# Altium PCB 总板.PcbDoc
Units mil, origin at the board's own origin, x right, y up, seen from the top; angles counter-clockwise.
Board outline 4330.71 x 3149.61 mil, 2 copper layers (Top Layer, Bottom Layer); 14 components, 43 nets, 169 pads, 21 vias.
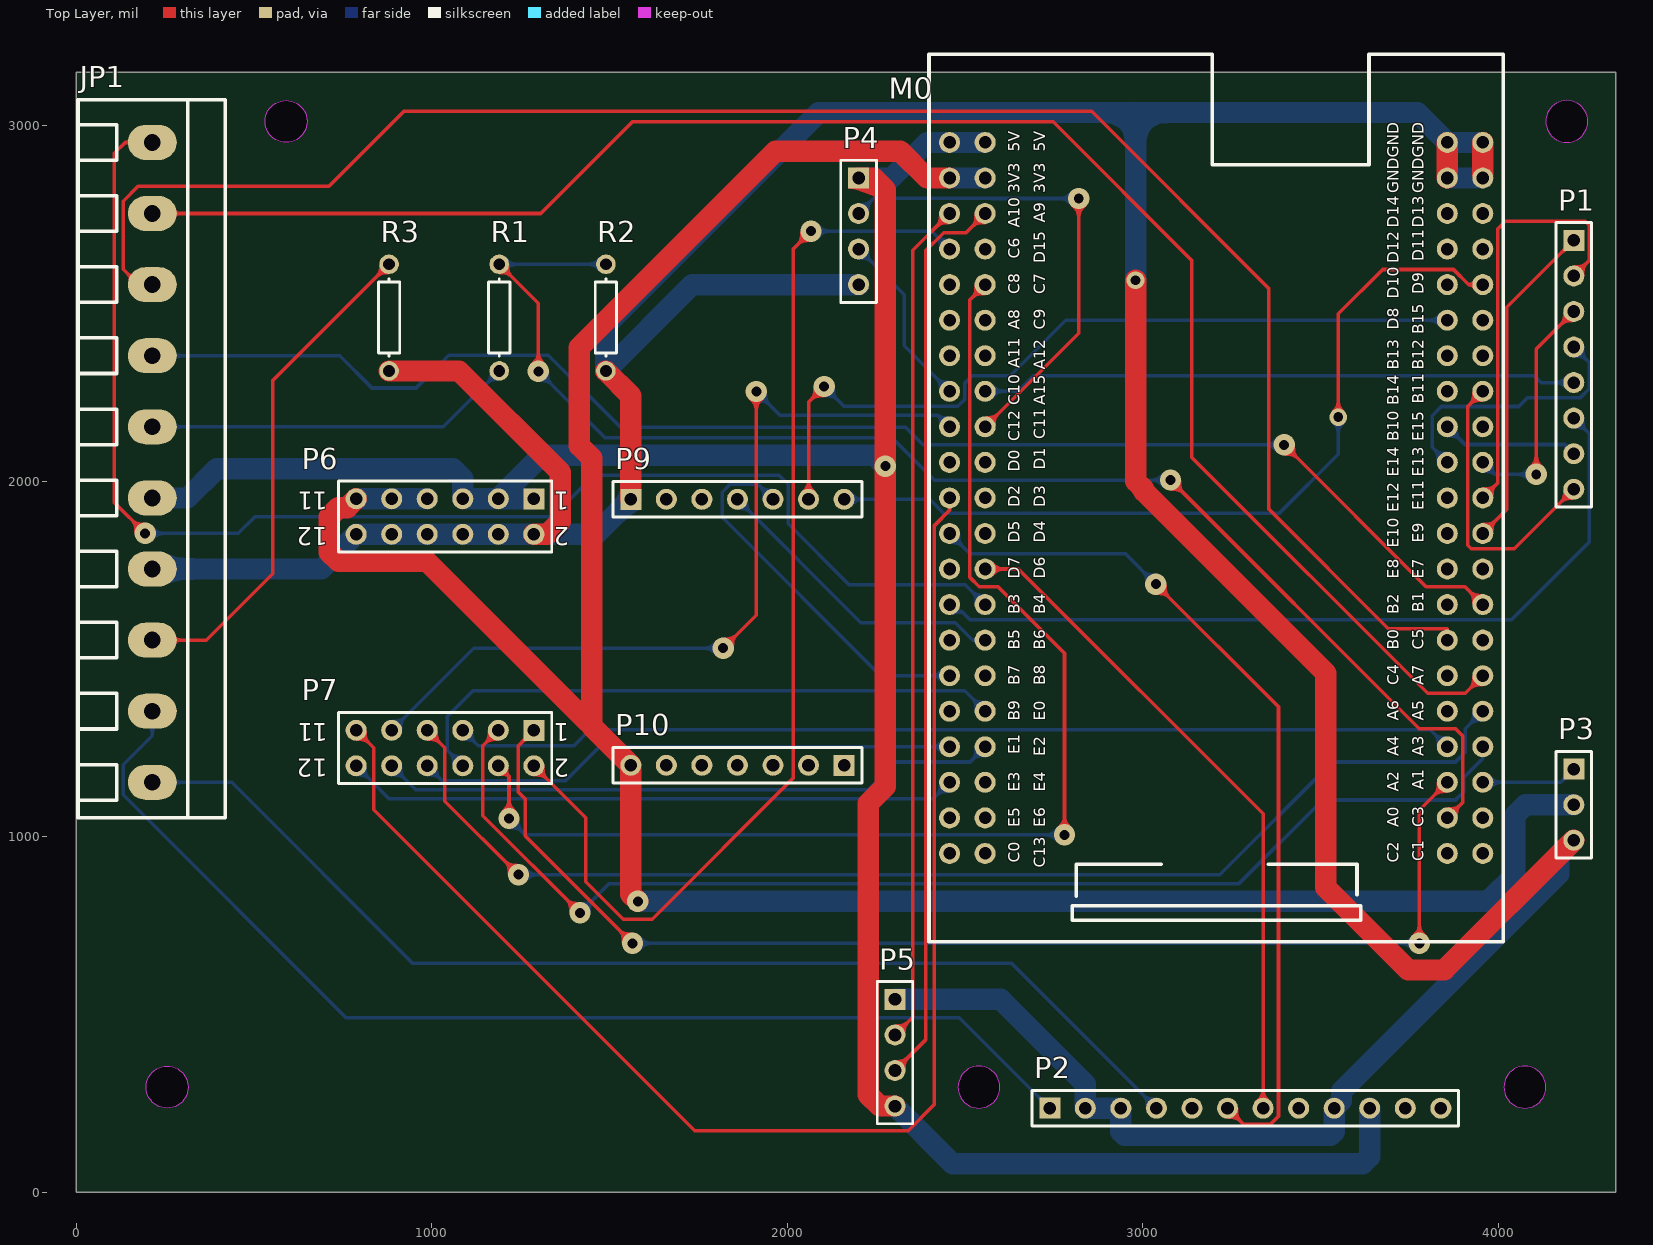
[diagram p0: Top Layer view]
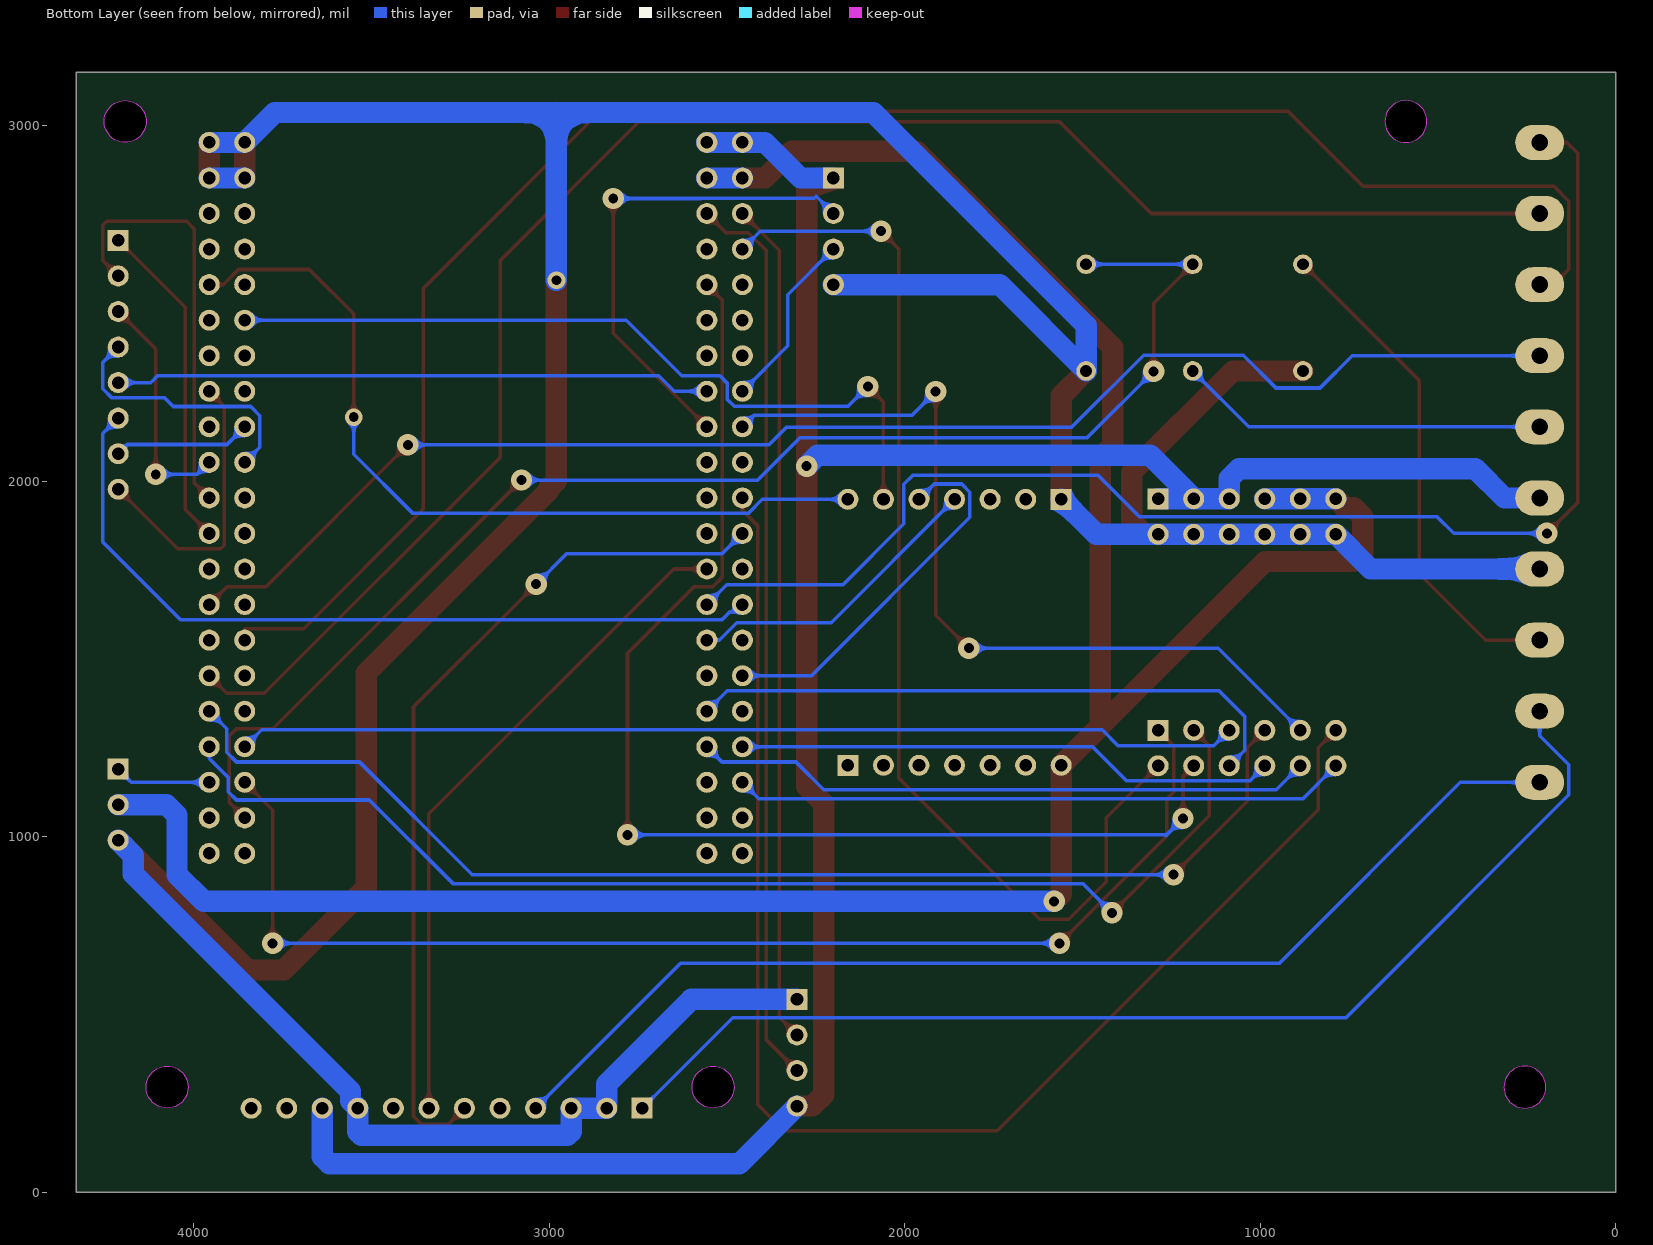
[diagram p1: Bottom Layer view, seen from below]

## Layer stack, top to bottom
Top Solder: solder mask 0.4, Solder Resist, Dk 3.5
Top Layer: signal copper 1.4
Dielectric 1: dielectric 12.6, FR-4, Dk 4.8
Bottom Layer: signal copper 1.4
Bottom Solder: solder mask 0.4, Solder Resist, Dk 3.5

## Board outline
0,0 4330.71,0 4330.71,3149.61 0,3149.61
cut-out: 4133.86,3011.81 ccw(c4192.91,3011.81) 4192.91,2952.76 ccw(c4192.91,3011.81) 4251.97,3011.81 ccw(c4192.91,3011.81) 4192.91,3070.87 ccw(c4192.91,3011.81)
cut-out: 590.55,2952.76 cw(c590.55,3011.81) 531.5,3011.81 cw(c590.55,3011.81) 590.55,3070.87 cw(c590.55,3011.81) 649.61,3011.81 cw(c590.55,3011.81)
cut-out: 255.91,236.22 cw(c255.91,295.28) 196.85,295.28 cw(c255.91,295.28) 255.91,354.33 cw(c255.91,295.28) 314.96,295.28 cw(c255.91,295.28)
cut-out: 4015.75,295.28 ccw(c4074.8,295.28) 4074.8,236.22 ccw(c4074.8,295.28) 4133.86,295.28 ccw(c4074.8,295.28) 4074.8,354.33 ccw(c4074.8,295.28)
cut-out: 2480.32,295.28 ccw(c2539.37,295.28) 2539.37,236.22 ccw(c2539.37,295.28) 2598.43,295.28 ccw(c2539.37,295.28) 2539.37,354.33 ccw(c2539.37,295.28)

## Design rules (kind name [scope] priority, off if disabled: settings)
Clearance PWRClearance [InNetClass('PWR')] p1: gap=15 ignorepadtopadclearanceinfootprint=FALSE
Clearance SIGClearance [InNetClass('SIG')] p2: gap=8 ignorepadtopadclearanceinfootprint=FALSE
Clearance [All] p3 off: gap=10 ignorepadtopadclearanceinfootprint=FALSE
PolygonConnect [All] p1: connectstyle=Relief reliefconductorwidth=10 reliefentries=4 polygonreliefangle="90 Angle" airgapwidth=10
RoutingVias [All] p1: holewidth=28 width=60 viastyle="Through Hole" minholewidth=28 minwidth=50 maxholewidth=30 maxwidth=80
SolderMaskExpansion [All] p1: expansion=4
Width SignalWidth [InNetClass('SIG')] p1: maxlimit=10 minlimit=10 preferedwidth=10
Width PowerWidth [InNetClass('PWR')] p2: maxlimit=60 minlimit=60 preferedwidth=60 minimp=50.000000 maximp=50.000000 favimp=50.000000
Width [All] p3 off: maxlimit=10 minlimit=10 preferedwidth=10
30 further rules are at their usual default settings.

## Classes and differential pairs
net class SIG: NetJP1_1 NetJP1_2 NetJP1_3 NetJP1_4 NetJP1_5 NetJP1_8 NetJP1_9 NetJP1_10 NetM0_5 NetM0_6 NetM0_7 NetM0_10 NetM0_15 NetM0_16 NetM0_17 NetM0_18 NetM0_21 NetM0_23 NetM0_26 NetM0_27 NetM0_30 NetM0_31 NetM0_34 NetM0_35 NetM0_36 NetM0_37 NetM0_52 NetM0_53 NetM0_58 NetM0_59 NetM0_61 NetM0_62 NetM0_64 NetM0_66 NetM0_76 NetM0_77 NetM0_78 NetM0_79 NetM0_80 NetM0_81
net class PWR: 3.3V 5V GND

## Components (designator, comment, footprint, x,y, rotation, side; value= is the part's Value field where it differs from the comment)
JP1 "HDR-1X10" KF128-5.08-10P 214,2052.76 r270 top
M0 "FK407M3模块" FK407M3模块 3856.69,2952.76 r90 top
P1 "运动PWM" HDR1X8 4212.6,2677.17 r270 top
P2 "叠加板" HDR1X12 2738.58,236.22 r0 top
P3 "漏水传感器" HDR1X3 4212.6,1189.76 r270 top
P4 "水深传感器" HDR1X4 2200.79,2852.76 r270 top
P5 "TTL转485" HDR1X4 2303.15,542.13 r270 top
P6 "扩展口1" HDR2X6 1287.4,1950.39 r180 top
P7 "扩展口2" HDR2X6 1287.4,1299.21 r180 top
P9 "九轴板1" HDR1X7 1560,1948.82 r0 top
P10 "九轴板2" HDR1X7 2160,1200.79 r180 top
R1 "Res1" AXIAL-0.3 1190,2460 r90 top value=20K
R2 "Res2" AXIAL-0.3 1490,2460 r270 top value=5K
R3 "Res1" AXIAL-0.3 880,2460 r90 top value=0

## Footprints (in the part's own frame and the unit in brackets; to place one, negate y for a bottom-side part, rotate by r counter-clockwise, add the part's x,y. Pads: shape width x height; smd on the part's side, far side on the other; paste and mask are expansions set on the pad)
AXIAL-0.3 [mm] "Axial Device, Thru-Hole; 2 Leads; 0.3 in Pin Spacing"
  round 1.4 hole 0.85: 1(-3.81,0) 2(3.81,0)
  silkscreen extent -2.77,-0.76 2.77,0.76
FK407M3模块 [mm]
  round 1.5 hole 0.9: 1(0,35.56) 2(0,33.02) 3(-2.54,35.56) 4(-2.54,33.02) 5(-5.08,35.56) 6(-5.08,33.02) 7(-7.62,35.56) 8(-7.62,33.02) 9(-10.16,35.56) 10(-10.16,33.02) 11(-12.7,35.56) 12(-12.7,33.02) 13(-15.24,35.56) 14(-15.24,33.02) 15(-17.78,35.56) 16(-17.78,33.02) 17(-20.32,35.56) 18(-20.32,33.02) 19(-22.86,35.56) 20(-22.86,33.02) 21(-25.4,35.56) 22(-25.4,33.02) 23(-27.94,35.56) 24(-27.94,33.02) 25(-30.48,35.56) 26(-30.48,33.02) 27(-33.02,35.56) 28(-33.02,33.02) 29(-35.56,35.56) 30(-35.56,33.02) 31(-38.1,35.56) 32(-38.1,33.02) 33(-40.64,35.56) 34(-40.64,33.02) 35(-43.18,35.56) 36(-43.18,33.02) 37(-45.72,35.56) 38(-45.72,33.02) 39(-48.26,35.56) 40(-48.26,33.02) 41(-50.8,35.56) 42(-50.8,33.02) 43(0,0) 44(0,-2.54) 45(-2.54,0) 46(-2.54,-2.54) 47(-5.08,0) 48(-5.08,-2.54) 49(-7.62,0) 50(-7.62,-2.54) 51(-10.16,0) 52(-10.16,-2.54) 53(-12.7,0) 54(-12.7,-2.54) 55(-15.24,0) 56(-15.24,-2.54) 57(-17.78,0) 58(-17.78,-2.54) 59(-20.32,0) 60(-20.32,-2.54) 61(-22.86,0) 62(-22.86,-2.54) 63(-25.4,0) 64(-25.4,-2.54) 65(-27.94,0) 66(-27.94,-2.54) 67(-30.48,0) 68(-30.48,-2.54) 69(-33.02,0) 70(-33.02,-2.54) 71(-35.56,0) 72(-35.56,-2.54) 73(-38.1,0) 74(-38.1,-2.54) 75(-40.64,0) 76(-40.64,-2.54) 77(-43.18,0) 78(-43.18,-2.54) 79(-45.72,0) 80(-45.72,-2.54) 81(-48.26,0) 82(-48.26,-2.54) 83(-50.8,0) 84(-50.8,-2.54)
  silkscreen extent -57.1,-4.01 6.3,37.03
HDR1X3 [mm] "Connector; Header; 3 Position"
  rect 1.5x1.5 hole 0.9: 1(0,0)
  round 1.5 hole 0.9: 2(2.54,0) 3(5.08,0)
  silkscreen extent -1.27,-1.27 6.35,1.27
HDR1X4 [mm] "Connector; Header; 4 Position"
  rect 1.5x1.5 hole 0.9: 1(0,0)
  round 1.5 hole 0.9: 2(2.54,0) 3(5.08,0) 4(7.62,0)
  silkscreen extent -1.27,-1.27 8.89,1.27
HDR1X7 [mm] "Connector; Header; 7 Position"
  rect 1.5x1.5 hole 0.9: 1(0,0)
  round 1.5 hole 0.9: 2(2.54,0) 3(5.08,0) 4(7.62,0) 5(10.16,0) 6(12.7,0) 7(15.24,0)
  silkscreen extent -1.27,-1.27 16.51,1.27
HDR1X8 [mm] "Connector; Header; 8 Position"
  rect 1.5x1.5 hole 0.9: 1(0,0)
  round 1.5 hole 0.9: 2(2.54,0) 3(5.08,0) 4(7.62,0) 5(10.16,0) 6(12.7,0) 7(15.24,0) 8(17.78,0)
  silkscreen extent -1.27,-1.27 19.05,1.27
HDR1X12 [mm] "Connector; Header; 12 Position"
  rect 1.5x1.5 hole 0.9: 1(0,0)
  round 1.5 hole 0.9: 2(2.54,0) 3(5.08,0) 4(7.62,0) 5(10.16,0) 6(12.7,0) 7(15.24,0) 8(17.78,0) 9(20.32,0) 10(22.86,0) 11(25.4,0) 12(27.94,0)
  silkscreen extent -1.27,-1.27 29.21,1.27
HDR2X6 [mm] "Connector; Header; 6x2 Position"
  rect 1.5x1.5 hole 0.9: 1(0,0)
  round 1.5 hole 0.9: 2(0,2.54) 3(2.54,0) 4(2.54,2.54) 5(5.08,0) 6(5.08,2.54) 7(7.62,0) 8(7.62,2.54) 9(10.16,0) 10(10.16,2.54) 11(12.7,0) 12(12.7,2.54)
  silkscreen extent -1.27,-1.27 13.97,3.81
KF128-5.08-10P [mm] "螺钉式接线端子，脚距5.08mm"
  oval 2.5x3.5 hole 1.2: 1(-22.86,0) 2(-17.78,0) 3(-12.7,0) 4(-7.62,0) 5(-2.54,0) 6(2.54,0) 7(7.62,0) 8(12.7,0) 9(17.78,0) 10(22.86,0)
  silkscreen extent -25.91,-5.31 25.4,5.21, body extent -25.9,-5.3 25.4,5.2, height 14.15

## Part data
JP1: library part "Header 10", "10P接插件"
P1: library part "Header 8", "Header, 8-Pin", LatestRevisionDate=17-Jul-2002, LatestRevisionNote="Re-released for DXP Platform.", Publisher="Altium Limited"
P2: library part "Header 12", "Header, 12-Pin", LatestRevisionDate=17-Jul-2002, LatestRevisionNote="Re-released for DXP Platform.", Publisher="Altium Limited"
P3: library part "Header 3", "Header, 3-Pin", LatestRevisionDate=17-Jul-2002, LatestRevisionNote="Re-released for DXP Platform.", Publisher="Altium Limited"
P4 P5: library part "Header 4", "Header, 4-Pin", LatestRevisionDate=17-Jul-2002, LatestRevisionNote="Re-released for DXP Platform.", Publisher="Altium Limited"
P6 P7: library part "Header 6X2", "Header, 6-Pin, Dual row", LatestRevisionDate=17-Jul-2002, LatestRevisionNote="Re-released for DXP Platform.", Publisher="Altium Limited"
P9 P10: library part "Header 7", "Header, 7-Pin", LatestRevisionDate=17-Jul-2002, LatestRevisionNote="Re-released for DXP Platform.", Publisher="Altium Limited"
R1 R3: "Resistor", LatestRevisionDate=17-Jul-2002, LatestRevisionNote="Re-released for DXP Platform.", PackageDescription="Axial Device, Thru-Hole; 2 Leads; 0.3 in Pin Spacing", PackageReference=AXIAL-0.3, Published=8-Jun-2000, Publisher="Altium Limited"
R2: library part Res1, "Resistor", LatestRevisionDate=17-Jul-2002, LatestRevisionNote="Re-released for DXP Platform.", PackageDescription="Axial Device, Thru-Hole; 2 Leads; 0.3 in Pin Spacing", PackageReference=AXIAL-0.3, Published=8-Jun-2000, Publisher="Altium Limited"

## Via types
v1: diameter 60, hole 28, Top Layer to Bottom Layer, 19 vias
v2: diameter 50, hole 28, Top Layer to Bottom Layer, 2 vias

## Nets (pads, with @x,y where several pads share a name; then routed paths per layer and width w, separated by ;. In a path a pad name is that pad's centre, name@x,y a point inside that pad or via, vN(x,y) a via of type N, cw(c..) or ccw(c..) an arc to the next point about the centre after c; other vN are vias at no path point)
3.3V: M0.3 M0.4 P3.2 P6.7 P6.9 P6.11 P10.7 | length 7189.2
  Top Layer w60: P6.11 762.01,1925 737,1925 712,1900 712,1800 738,1774 986.79,1774 1436.93,1323.86 ; v1(1580,818) 1560,838 P10.7 1450,1310.79 1450,2064.92 1415,2099.92 1415,2375.92 1967.08,2928 2318,2928 2393.24,2852.76 M0.3
  Bottom Layer w60: P6.11 P6.9 P6.7 ; v1(1580,818) 3972,818 4047,893 4047,1060 4076.76,1089.76 P3.2 ; M0.3 M0.4
5V: JP1.6 M0.1 M0.2 P2.10 P4.1 P5.4 P6.1 P6.3 P6.5 | length 7270
  Top Layer w60: P5.4 2260,242.13 2228,274.13 2228,1093 2276,1141 v1(2276,2042) 2276,2820 ; 2276,2820 P4.1 2243.24,2852.76 2276,2820
  Bottom Layer w60: JP1.6 313,1952.76 395.24,2035 1060,2035 1087.4,2007.6 P6.5 P6.3 ; P6.1 P6.3 ; P4.1 2293.58,2852.76 2393.58,2952.76 M0.1 M0.2 ; v1(2276,2042) 2245.45,2072.55 1309.56,2072.55 ; P5.4 2465.28,80 3618.58,80 3638.58,100 P2.10 ; P6.3 1309.56,2072.55 ; P6.3 1309.56,2072.55
GND: JP1.7 M0.43 M0.44 M0.45 M0.46 P2.2 P2.3 P2.9 P3.3 P4.4 P5.1 P6.2 P6.4 P6.6 P6.8 P6.10 P6.12 P9.1 R2.2 R3.1 | length 12545.3
  Top Layer w60: R3.1 1076.93,2310 1361.93,2025 1361.93,1886.93 1325.39,1850.39 P6.2 ; R2.2 1560,2240 P9.1 ; v2(2980,2565) 2980,2000 3003,1977 3003,1971.93 3515,1459.93 3515,856.93 3746.93,625 3847.83,625 P3.3 ; M0.45 M0.43 ; M0.46@3956.69,2863.31 M0.44
  Bottom Layer w60: JP1.7 689.76,1752.76 P6.12 P6.10 P6.8 P6.6 P6.4 P6.2 1461.57,1850.39 P9.1 ; P4.4 1732.76,2552.76 R2.2 1490,2438 2089,3037 3772.45,3037 M0.43 M0.44 ; P5.1 2600.46,542.13 2838.58,304 P2.2 P2.3 2938.58,170 2948.58,160 3528.58,160 3538.58,170 P2.9 3559,256.64 3559,284 4170,895 4170,947.17 P3.3 ; v2(2980,2565) 2980,3037 ; M0.45 M0.46
NetJP1_1: JP1.1 M0.28 | length 3871.2
  Top Layer w10: v1(194,1853) 107.1,1939.9 107.1,2922.1 137.76,2952.76 JP1.1
  Bottom Layer w10: v1(194,1853) 456,1853 503.39,1900.39 1340,1900.39 1456.61,2017 1977,2017 2003,1991 2003,1880 2174,1709 2500.45,1709 M0.28
NetJP1_2: JP1.2 M0.74 | length 4860.9
  Top Layer w10: JP1.2 1306.52,2752.76 1564.76,3011 2748,3011 3138.35,2620.65 3138.35,2066.65 3802,1403 3906.94,1403 M0.74
NetJP1_3: JP1.3 M0.71 | length 5284.8
  Top Layer w10: JP1.3 175,2552.76 132.1,2595.65 132.1,2787.1 174,2829 711,2829 922,3040 2857,3040 3354,2543 3354,1922 3691,1585 ; M0.71 3856.69,1585 ; 3691,1585 3856.69,1585 ; 3691,1585 3856.69,1585
NetJP1_4: JP1.4 M0.70 | length 4108.9
  Top Layer w10: v1(3398,2102) 3797,1703 3906.45,1703 M0.70
  Bottom Layer w10: JP1.4 741.24,2352.76 832,2262 956,2262 1048,2354 1328,2354 1529.89,2152.11 2331.89,2152.11 2382,2102 v1(3398,2102)
NetJP1_5: JP1.5 R1.1 | length 1041.1
  Bottom Layer w10: JP1.5 1032.76,2152.76 R1.1
NetJP1_8: JP1.8 R3.2 | length 1422.1
  Top Layer w10: JP1.8 366,1552.76 553,1739.76 553,2283 R3.2
NetJP1_9: JP1.9 P2.1 | length 3240.5
  Bottom Layer w10: JP1.9 214,1284 132,1202 132,1118 759,491 2483.8,491 P2.1
NetJP1_10: JP1.10 P2.4 | length 3204.2
  Bottom Layer w10: JP1.10 437.24,1152.76 946,644 2630.8,644 P2.4
NetM0_5: M0.5 P5.2 | length 2374.2
  Top Layer w10: P5.2 2353,491.98 2353,2649.06 M0.5
NetM0_6: M0.6 P5.3 | length 2552.5
  Top Layer w10: P5.3 2389.16,428.14 2389.16,2648.16 2440,2699 2502.94,2699 M0.6
NetM0_7: M0.7 P7.2 | length 3147.1
  Top Layer w10: P7.2 1433.52,1053.09 1433.52,873.48 1539,768 1620,768 2017,1165 2017,2653 v1(2067,2703)
  Bottom Layer w10: v1(2067,2703) 2406.45,2703 M0.7
NetM0_10: M0.10 P7.4 | length 3450.6
  Top Layer w10: P7.4 1217.4,1169.21 v1(1217.4,1051) ; M0.10 2514,2510.06 2514,1729 2540,1703 2593,1703 2780,1516 v1(2780,1005)
  Bottom Layer w10: v1(1217.4,1051) 1265.4,1003 1267.4,1005 v1(2780,1005)
NetM0_15: M0.15 P4.3 | length 506
  Bottom Layer w10: P4.3 2329,2524.54 2329,2380.45 M0.15
NetM0_16: M0.16 P1.5 | length 1681.6
  Bottom Layer w10: M0.16 2648.76,2252.76 2692,2296 4102,2296 4120.83,2277.17 P1.5
NetM0_17: M0.17 P7.9 | length 2373.5
  Top Layer w10: v1(1820,1530) 1913,1623 v1(1913,2252)
  Bottom Layer w10: P7.9 1118.19,1530 v1(1820,1530) ; v1(1913,2252) 1979.77,2185.23 2424.22,2185.23 M0.17
NetM0_18: M0.18 P4.2 | length 1393
  Top Layer w10: M0.18 2820,2416.06 v1(2820,2795)
  Bottom Layer w10: P4.2 2249.03,2801 2254.75,2795.28 2574.31,2795.28 2574.59,2795 v1(2820,2795)
NetM0_21: M0.21 P7.11 | length 3948.9
  Top Layer w10: P7.11 837,1249.61 837,1076 1740,173 2340,173 2414.16,247.16 2414.16,1875.16 2456.69,1917.69 M0.21
NetM0_23: M0.23 P2.6 | length 2449.8
  Top Layer w10: v1(3037,1710) 3382,1365 3382,213.59 3360,191.59 3283.21,191.59 P2.6
  Bottom Layer w10: M0.23 2514,1795.45 2951.55,1795.45 v1(3037,1710)
NetM0_26: M0.26 P2.7 | length 1895.1
  Top Layer w10: M0.26 2650,1752.76 3338.58,1064.17 P2.7
NetM0_27: M0.27 P1.6 | length 2321.4
  Bottom Layer w10: M0.27 M0.27@2456.69,1632 ; P1.6 4256,2133.76 4256,1829 4037.23,1610.23 2514,1610.23 2492.23,1632 ; M0.27@2456.69,1632 2492.23,1632 ; M0.27@2456.69,1632 2492.23,1632
NetM0_30: M0.30 P9.4 | length 860.7
  Bottom Layer w10: P9.4 2206.82,1602 2472.39,1602 2521.64,1552.76 M0.30
NetM0_31: M0.31 P9.5 | length 1065.5
  Bottom Layer w10: P9.5 1916.82,1992 1840,1992 1817,1969 1817,1898 2262.24,1452.76 M0.31
NetM0_34: M0.34 P7.6 | length 1723
  Bottom Layer w10: P7.6 1044,1242.61 1044,1338 1116,1410 2499.45,1410 M0.34
NetM0_35: M0.35 P7.8 | length 1526.7
  Bottom Layer w10: P7.8 1029.93,1156.68 1376.01,1156.68 1472.08,1252.76 M0.35
NetM0_36: M0.36 P7.10 | length 1747.4
  Bottom Layer w10: P7.10 954.93,1131.68 2227.68,1131.68 2306,1210 2513.94,1210 M0.36
NetM0_37: M0.37 P7.12 | length 1726.7
  Bottom Layer w10: P7.12 879.93,1106.68 2410.62,1106.68 M0.37
NetM0_52: M0.52 P9.7 | length 2345.5
  Top Layer w10: v2(3550,2180) 3550,2470.57 3674.72,2595.28 3874.31,2595.28 3916.84,2552.76 M0.52
  Bottom Layer w10: P9.7 2400.48,1948.82 2439.08,1910.23 3384.77,1910.23 3550,2075.46 v2(3550,2180)
NetM0_53: M0.53 P9.6 | length 2238.5
  Top Layer w10: P9.6 2060,2222 v1(2104,2266)
  Bottom Layer w10: v1(2104,2266) 2159.77,2210.23 2480,2210.23 2500,2230.23 2500,2276 2520,2296 2627,2296 2783.76,2452.76 M0.53
NetM0_58: M0.58 P1.8 | length 822.4
  Top Layer w10: M0.58 3914,2210.06 3914,1820 3924,1810 4045.43,1810 P1.8
NetM0_59: M0.59 P1.7 | length 387.2
  Bottom Layer w10: M0.59 3906.45,2103 4186.76,2103 P1.7
NetM0_61: M0.61 P1.4 | length 757.6
  Bottom Layer w10: M0.61 3814,2095.45 3814,2184 3840,2210 4058,2210 4082,2234 4230,2234 4256,2260 4256,2333.76 P1.4
NetM0_62: M0.62 P1.3 | length 666.2
  Top Layer w10: v1(4107,2019) 4107,2371.57 P1.3
  Bottom Layer w10: M0.62 3990.45,2019 v1(4107,2019)
NetM0_64: M0.64 P1.2 | length 1205.8
  Top Layer w10: M0.64 3999.22,1995.28 3999.22,2710.22 4020,2731 4245,2731 4256,2720 4256,2620.57 P1.2
NetM0_66: M0.66 P1.1 | length 930.4
  Top Layer w10: M0.66 4024.22,1920.28 4024.22,2488.79 P1.1
NetM0_76: M0.76 P7.7 | length 3454.3
  Top Layer w10: P7.7 1037,1249.61 1037,1100 v1(1244,893)
  Bottom Layer w10: v1(1244,893) 3217,893 3534,1210 3880,1210 3907,1237 3907,1303.06 M0.76
NetM0_77: M0.77 P7.5 | length 2825.8
  Bottom Layer w10: P7.5 1130.61,1256 1400.05,1256 1445,1300.95 3808.5,1300.95 M0.77
NetM0_78: M0.78 P7.3 | length 3420.3
  Top Layer w10: P7.3 1144,1255.81 1144,1059 v1(1417.2,785.8)
  Bottom Layer w10: v1(1417.2,785.8) 1499.4,868 3271,868 3506,1103 3880,1103 3903,1126 3903,1166.31 3956.69,1220 M0.78
NetM0_79: M0.79 P7.1 | length 3448.5
  Top Layer w10: P7.1 1244,1255.81 1244,1125 1263,1106 1263,1002 v1(1565,700) ; v1(3778,700) 3778,1074.06 M0.79
  Bottom Layer w10: v1(1565,700) v1(3778,700)
NetM0_80: M0.80 P3.1 | length 271.2
  Bottom Layer w10: M0.80 4175.59,1152.76 P3.1
NetM0_81: M0.81 R1.2 R2.1 | length 3919.7
  Top Layer w10: R1.2 1300,2500 v1(1300,2309) ; v1(3078,2003) 3778,1303 3880,1303 3900,1283 3900,1096.06 M0.81
  Bottom Layer w10: R1.2 R2.1 ; v1(1300,2309) 1486.45,2122.55 2294.45,2122.55 2414,2003 v1(3078,2003)
pads on no net: M0.8 M0.9 M0.11 M0.12 M0.13 M0.14 M0.19 M0.20 M0.22 M0.24 M0.25 M0.29 M0.32 M0.33 M0.38 M0.39 M0.40 M0.41 M0.42 M0.47 M0.48 M0.49 M0.50 M0.51 M0.54 M0.55 M0.56 M0.57 M0.60 M0.63 M0.65 M0.67 M0.68 M0.69 M0.72 M0.73 M0.75 M0.82 M0.83 M0.84 P2.5 P2.8 P2.11 P2.12 P9.2 P9.3 P10.1 P10.2 P10.3 P10.4 P10.5 P10.6

## Polygon pours and split planes (outlines as drawn)
no net on Top Overlay (solid): 770,585

## Other copper
Top Layer:
  region: 1655,2885

## Silkscreen, mask and mechanical layers (free items; w line width, h text height)
Mechanical 1:
  lines w10: 4325,5 4330,0 ; 0,0 0,3149.61 4330.71,3149.61 4330.71,0 0,0

## Text inside footprints (layer, text, board x,y; h text height)
M0: Top Overlay "5V" at 2653.69,2926.1 h32 r90; Top Overlay "3V3" at 2653.69,2810.1 h32 r90; Top Overlay "A10" at 2653.69,2712.77 h32 r90; Top Overlay "C6" at 2653.69,2626.1 h32 r90; Top Overlay "C8" at 2653.69,2526.1 h32 r90; Top Overlay "A8" at 2653.69,2426.1 h32 r90; Top Overlay "A11" at 2653.69,2318.1 h32 r90; Top Overlay "C10" at 2653.69,2212.77 h32 r90; Top Overlay "C12" at 2653.69,2112.77 h32 r90; Top Overlay "D0" at 2653.69,2026.1 h32 r90; Top Overlay "D2" at 2653.69,1926.1 h32 r90; Top Overlay "D5" at 2653.69,1826.1 h32 r90; Top Overlay "D7" at 2653.69,1726.1 h32 r90; Top Overlay "B3" at 2653.69,1626.1 h32 r90; Top Overlay "B5" at 2653.69,1526.1 h32 r90; Top Overlay "B7" at 2653.69,1426.1 h32 r90; Top Overlay "B9" at 2653.69,1326.1 h32 r90; Top Overlay "E1" at 2653.69,1231.43 h32 r90; Top Overlay "E3" at 2653.69,1126.1 h32 r90; Top Overlay "E5" at 2653.69,1026.1 h32 r90; Top Overlay "C0" at 2653.69,926.1 h32 r90; Top Overlay "C13" at 2725.71,912.77 h32 r90; Top Overlay "E6" at 2725.71,1026.1 h32 r90; Top Overlay "E4" at 2725.71,1126.1 h32 r90; Top Overlay "E2" at 2725.71,1226.1 h32 r90; Top Overlay "E0" at 2725.71,1326.1 h32 r90; Top Overlay "B8" at 2725.71,1426.1 h32 r90; Top Overlay "B6" at 2725.71,1526.1 h32 r90; Top Overlay "B4" at 2725.71,1626.1 h32 r90; Top Overlay "D6" at 2725.71,1726.1 h32 r90; Top Overlay "D4" at 2725.71,1826.1 h32 r90; Top Overlay "D3" at 2725.71,1926.1 h32 r90; Top Overlay "D1" at 2725.71,2031.43 h32 r90; Top Overlay "C11" at 2725.71,2118.1 h32 r90; Top Overlay "A15" at 2725.71,2212.77 h32 r90; Top Overlay "A12" at 2725.71,2312.77 h32 r90; Top Overlay "C9" at 2725.71,2426.1 h32 r90; Top Overlay "C7" at 2725.71,2526.1 h32 r90; Top Overlay "D15" at 2725.71,2612.77 h32 r90; Top Overlay "A9" at 2725.71,2726.1 h32 r90; Top Overlay "3V3" at 2725.71,2810.1 h32 r90; Top Overlay "5V" at 2725.71,2926.1 h32 r90; Top Overlay "GND" at 3719.69,2910.1 h32 r90; Top Overlay "GND" at 3719.69,2810.1 h32 r90; Top Overlay "D14" at 3719.69,2712.77 h32 r90; Top Overlay "D12" at 3719.69,2612.77 h32 r90; Top Overlay "D10" at 3719.69,2512.77 h32 r90; Top Overlay "D8" at 3719.69,2426.1 h32 r90; Top Overlay "B13" at 3719.69,2312.77 h32 r90; Top Overlay "B14" at 3719.69,2212.77 h32 r90; Top Overlay "B10" at 3719.69,2112.77 h32 r90; Top Overlay "E14" at 3719.69,2012.77 h32 r90; Top Overlay "E12" at 3719.69,1912.77 h32 r90; Top Overlay "E10" at 3719.69,1812.77 h32 r90; Top Overlay "E8" at 3719.69,1726.1 h32 r90; Top Overlay "B2" at 3719.69,1626.1 h32 r90; Top Overlay "B0" at 3719.69,1526.1 h32 r90; Top Overlay "C4" at 3719.69,1426.1 h32 r90; Top Overlay "A6" at 3719.69,1326.1 h32 r90; Top Overlay "A4" at 3719.69,1226.1 h32 r90; Top Overlay "A2" at 3719.69,1126.1 h32 r90; Top Overlay "A0" at 3719.69,1026.1 h32 r90; Top Overlay "C2" at 3719.69,926.1 h32 r90; Top Overlay "C1" at 3791.11,931.43 h32 r90; Top Overlay "C3" at 3791.11,1026.1 h32 r90; Top Overlay "A1" at 3791.11,1131.43 h32 r90; Top Overlay "A3" at 3791.11,1226.1 h32 r90; Top Overlay "A5" at 3791.11,1326.1 h32 r90; Top Overlay "A7" at 3791.11,1426.1 h32 r90; Top Overlay "C5" at 3791.11,1526.1 h32 r90; Top Overlay "B1" at 3791.11,1631.43 h32 r90; Top Overlay "E7" at 3791.11,1726.1 h32 r90; Top Overlay "E9" at 3791.11,1826.1 h32 r90; Top Overlay "E11" at 3791.11,1918.1 h32 r90; Top Overlay "E13" at 3791.11,2012.77 h32 r90; Top Overlay "E15" at 3791.11,2112.77 h32 r90; Top Overlay "B11" at 3791.11,2218.1 h32 r90; Top Overlay "B12" at 3791.11,2312.77 h32 r90; Top Overlay "B15" at 3791.11,2412.77 h32 r90; Top Overlay "D9" at 3791.11,2526.1 h32 r90; Top Overlay "D11" at 3791.11,2618.1 h32 r90; Top Overlay "D13" at 3791.11,2712.77 h32 r90; Top Overlay "GND" at 3791.11,2810.1 h32 r90; Top Overlay "GND" at 3791.11,2910.1 h32 r90
P6: Top Overlay "12" at 707.4,1870.39 h50 r180; Top Overlay "1" at 667.4,1970.39 h50 r180; Top Overlay "1" at 707.4,1970.39 h50 r180; Top Overlay "1" at 1387.4,1970.39 h50 r180; Top Overlay "2" at 1387.4,1870.39 h50 r180
P7: Top Overlay "12" at 707.4,1219.21 h50 r180; Top Overlay "1" at 667.4,1319.21 h50 r180; Top Overlay "1" at 707.4,1319.21 h50 r180; Top Overlay "1" at 1387.4,1319.21 h50 r180; Top Overlay "2" at 1387.4,1219.21 h50 r180